# EAGLE board lm3410-sepic-led-driver-15mm-mk-1 (EAGLE 6.5.0)
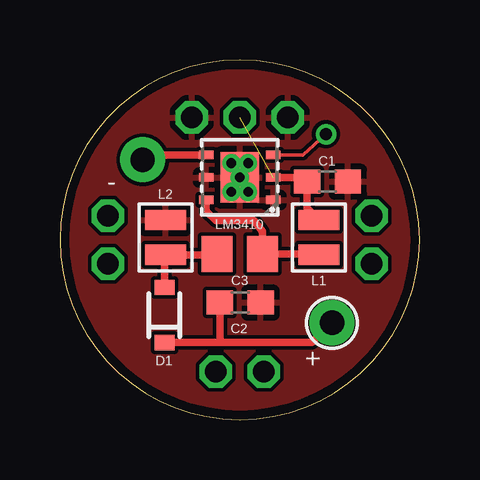
[diagram p0: board, top side]
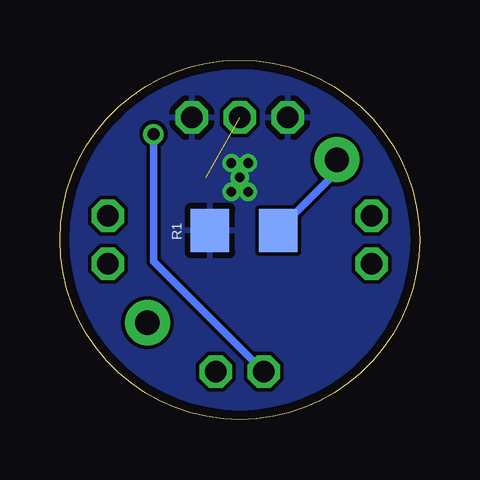
[diagram p1: board, bottom side, seen from below]

Size 15 x 15 mm. Coordinates in mm from the lower left corner, seen from the top.
Outline: 0,7.5 arc90 7.5,0 arc90 15,7.5 arc90 7.5,15 arc90 0,7.5
Copper layers (1*16): Top 0.0356mm / dielectric 1.5011mm / Bottom 0.0356mm
Design rules "LaenPCBOrder2": minimum track width 6mil, minimum drill 13mil, track to track 6mil, track to pad 6mil, pad to pad 6mil, via to via 6mil, smd to smd 6mil, copper to edge 15mil, drill to drill 6mil, minimum pad ring 7mil, minimum via ring 7mil, stop-mask expansion 3mil, vias tented up to drill 20mil, thermal gap 10mil

## Footprints (pad centres in the part's own frame; a part is rotated, then mirrored left to right if it is on the bottom)
1X01-KIT = drill 1.016 pad 1.88: 1 0,0
1X01NS-KIT = drill 1.016 pad 1.88: 1 0,0
C0603 = smd 1.1 x 1: 1 -0.85,0; 2 0.85,0
C0805 = smd 1.3 x 1.5: 1 -0.95,0; 2 0.95,0
SOD-323 = smd 0.63 x 0.83: A 1.15,0; C -1.15,0
1X03-2MM-PTH = drill 0.9 octagon: P$1 -2,0; P$2 0,0; P$3 2,0
1X02-2MM-PTH = drill 0.9 octagon: P$1 -1,0; P$2 1,0
INDUCTOR_2X1.6MM = smd 0.85 x 1.7: P$1 -0.725,0; P$2 0.725,0
DFN300X300X80-7N = smd 0.61 x 0.356: 1 -1.397,0.94; 2 -1.397,0; 3 -1.397,-0.94; 4 1.397,-0.94; 5 1.397,0; 6 1.397,0.94 | smd 1.6 x 2.108: 7 0,0 | drill 0.4: 7@1 -0.35,0.6; 7@2 0.35,0.6; 7@3 -0.35,-0.6; 7@4 0.35,-0.6; 7@5 0,0
R1206 = smd 1.6 x 1.803: 1 -1.422,0; 2 1.422,0

## Placement (x,y rotation side)
+  M01PTH-KIT  [1X01-KIT]  11.35,4.04 180 top
-  M01NOSILK-KIT  [1X01NS-KIT]  3.45,10.84 0 top
C1  10uF  [C0603]  11.16,9.92 0 top
C2  10uF  [C0603]  7.52,4.88 0 top
C3  2.2uF  [C0805]  7.5,6.9 180 top
D1  BAT20J  [SOD-323]  4.36,4.36 90 top
JP1  [1X03-2MM-PTH]  7.5,12.6 0 top
JP2  M02PTH-2MM  [1X02-2MM-PTH]  13,7.5 90 top
JP3  M02PTH-2MM  [1X02-2MM-PTH]  7.5,2 0 top
JP4  M02PTH-2MM  [1X02-2MM-PTH]  2,7.5 90 top
L1  4.7uH  [INDUCTOR_2X1.6MM]  10.8,7.6 270 top
L2  4.7uH  [INDUCTOR_2X1.6MM]  4.4,7.6 90 top
LM3410  LM3410XSD  [DFN300X300X80-7N]  7.5,10.1 180 top
R1  0.68  [R1206]  7.32,7.89 0 bottom

## Library data of the parts
+ - C1-C3 JP1-JP4 L1 L2 R1 = A_butts
D1 = A_butts; PROD_ID: DIO-11623
LM3410 = A_butts; MPN: LM3410XSD; OC_FARNELL: -; OC_NEWARK: 11N9218; PACKAGE: DFN-6; SUPPLIER: National Semiconductor

## Nets
D0: JP3.P$1 LM3410.3
D1: JP2.P$1
D2: JP2.P$2
D3: JP4.P$1
D4: JP3.P$2
D5: JP4.P$2
GND: C1.2 C2.2 JP1.P$1 JP1.P$3 L2.P$2 LM3410.1 LM3410.5 LM3410.7 LM3410.7@1 LM3410.7@2 LM3410.7@3 LM3410.7@4 LM3410.7@5 R1.1
LED_ANODE: +.1 C2.1 D1.C
N$1: C3.2 D1.A L2.P$1
N$6: -.1 LM3410.4 R1.2
SW: C3.1 L1.P$2 LM3410.6
V_BATT+: C1.1 JP1.P$2 L1.P$1 LM3410.2

## Tracks (layer width: path | path; a pad name or v marks a point on that pad's centre or on a via)
D0  (via drill 0.5)
  Top 0.152: v11.1,11.9 10.14,11.04 LM3410.3
  Bottom 0.305: JP3.P$1 11.1,6.6 v11.1,11.9
GND
  pour Top (rank 6): 7.5,0 arc-90 0,7.5 arc-90 7.5,15 arc-90 15,7.5 arc-90
  pour Bottom (rank 6): 7.5,0 arc-90 0,7.5 arc-90 7.5,15 arc-90 15,7.5 arc-90
LED_ANODE
  Top 0.305: D1.C 6.6,3.21 | 6.6,3.21 10.52,3.21 +.1 | C2.1 6.67,3.28 6.6,3.21
N$1
  Top 0.305: D1.A 4.36,6.83 L2.P$1 6.53,6.88 C3.2
N$6
  Top 0.305: -.1 3.65,11.04 LM3410.4
  Bottom 0.305: R1.2 3.45,10.34 -.1
SW
  Top 0.305: LM3410.6 6.1,8.7 6.5,8.3 8.1,8.3 8.45,7.85 C3.1 10.78,6.9 L1.P$2
V_BATT+  (1 unrouted)
  Top 0.305: LM3410.2 10.13,10.1 arc-90 C1.1 10.31,8.81 L1.P$1